# Altium PCB Tui2.PcbDoc
Units mil, origin at the board's own origin, x right, y up, seen from the top; angles counter-clockwise.
Board outline 3929.03 x 3937.01 mil, 2 copper layers (Top Layer, Bottom Layer), stack 40.6 mil thick; 72 components, 43 nets, 288 pads, 92 vias.
Unrouted connection lines stored in the file: 29.
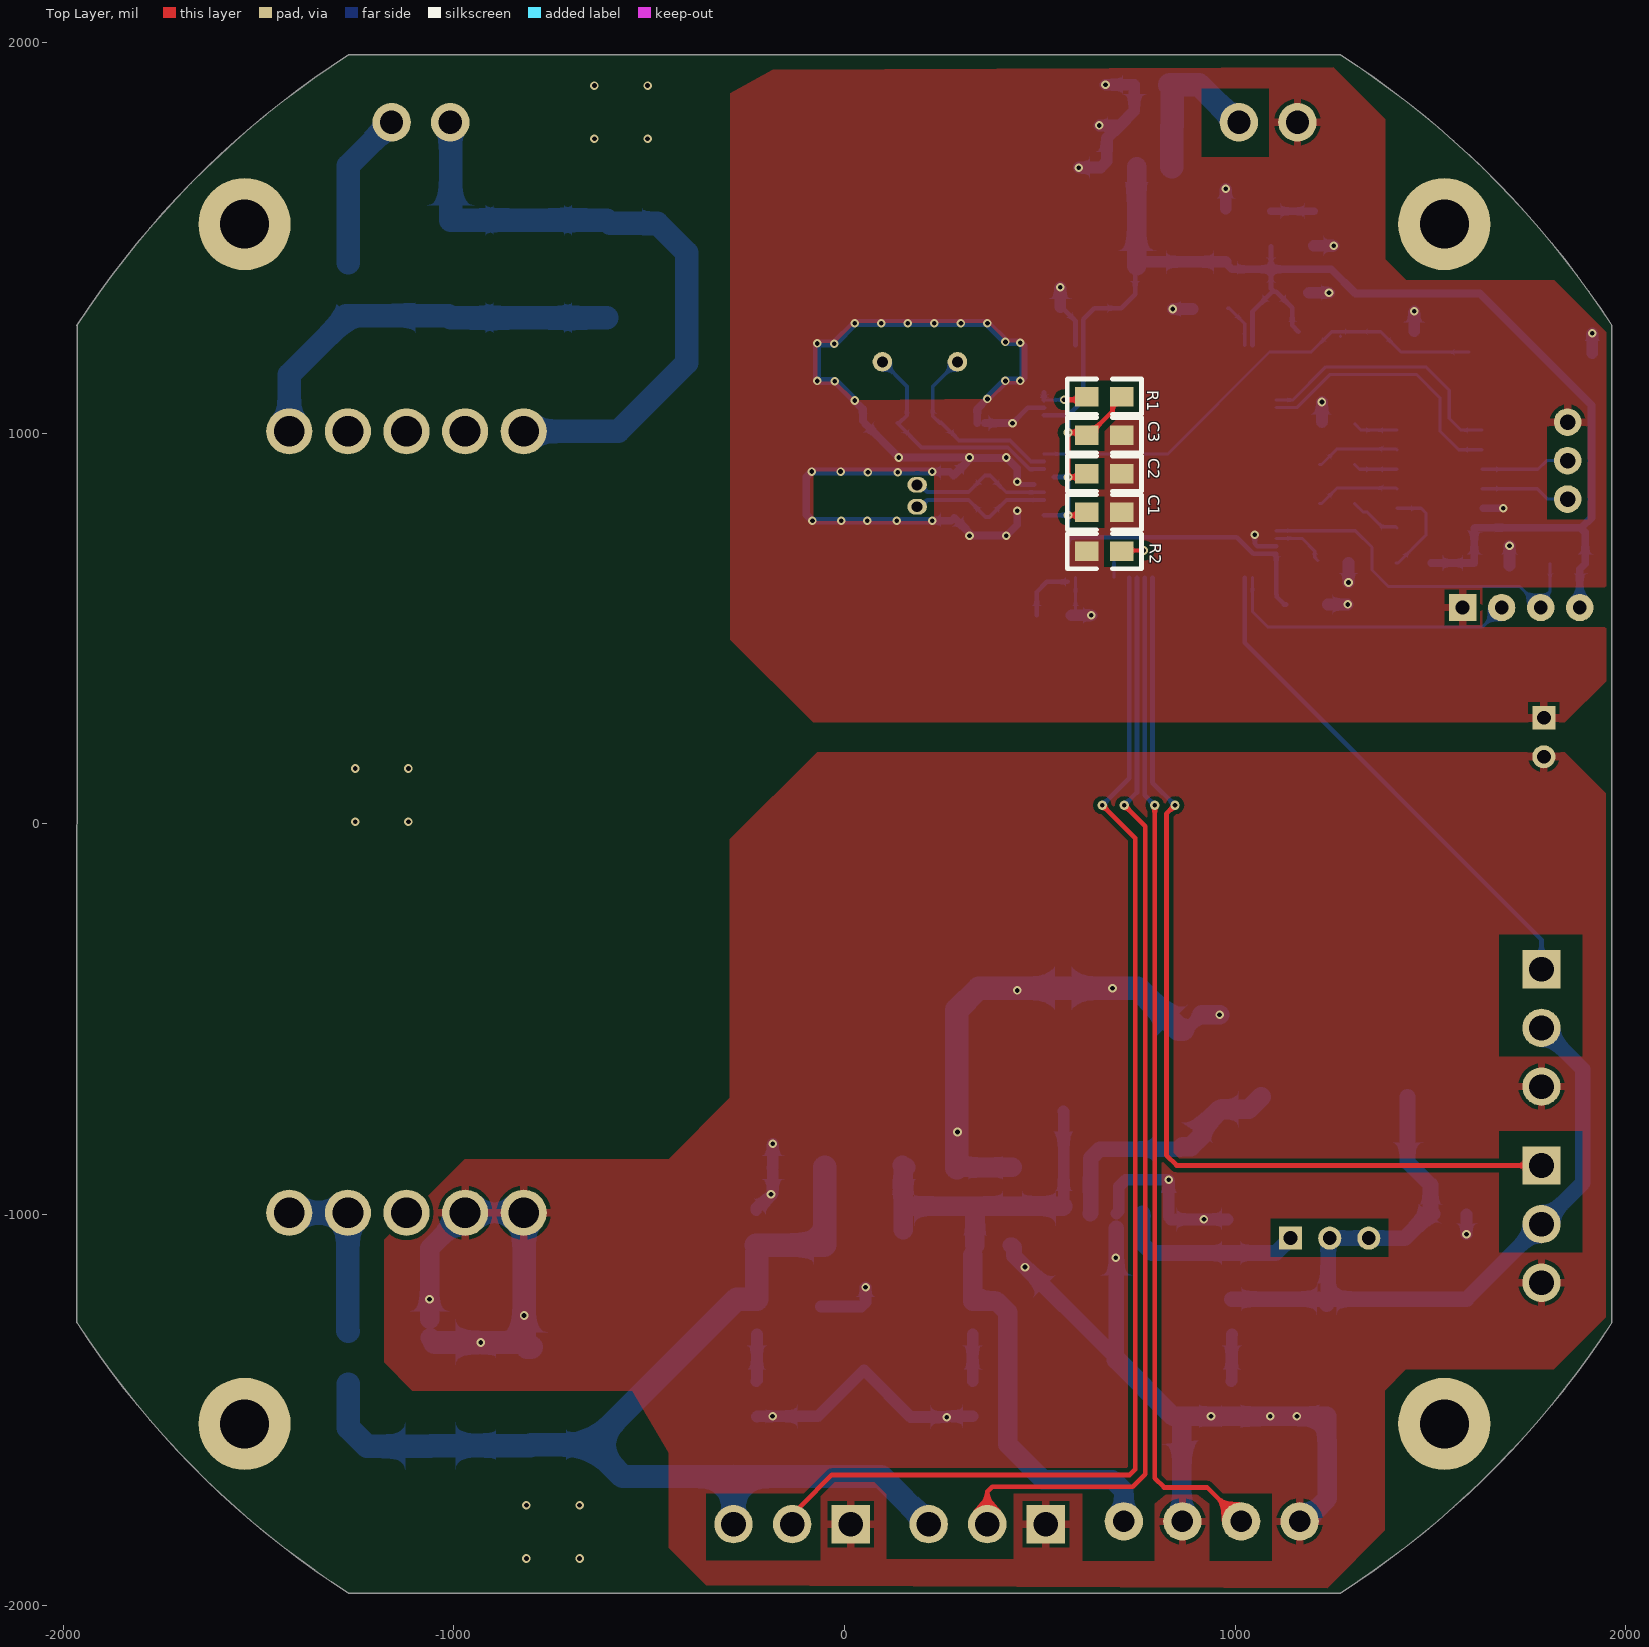
[diagram p0: Top Layer view]
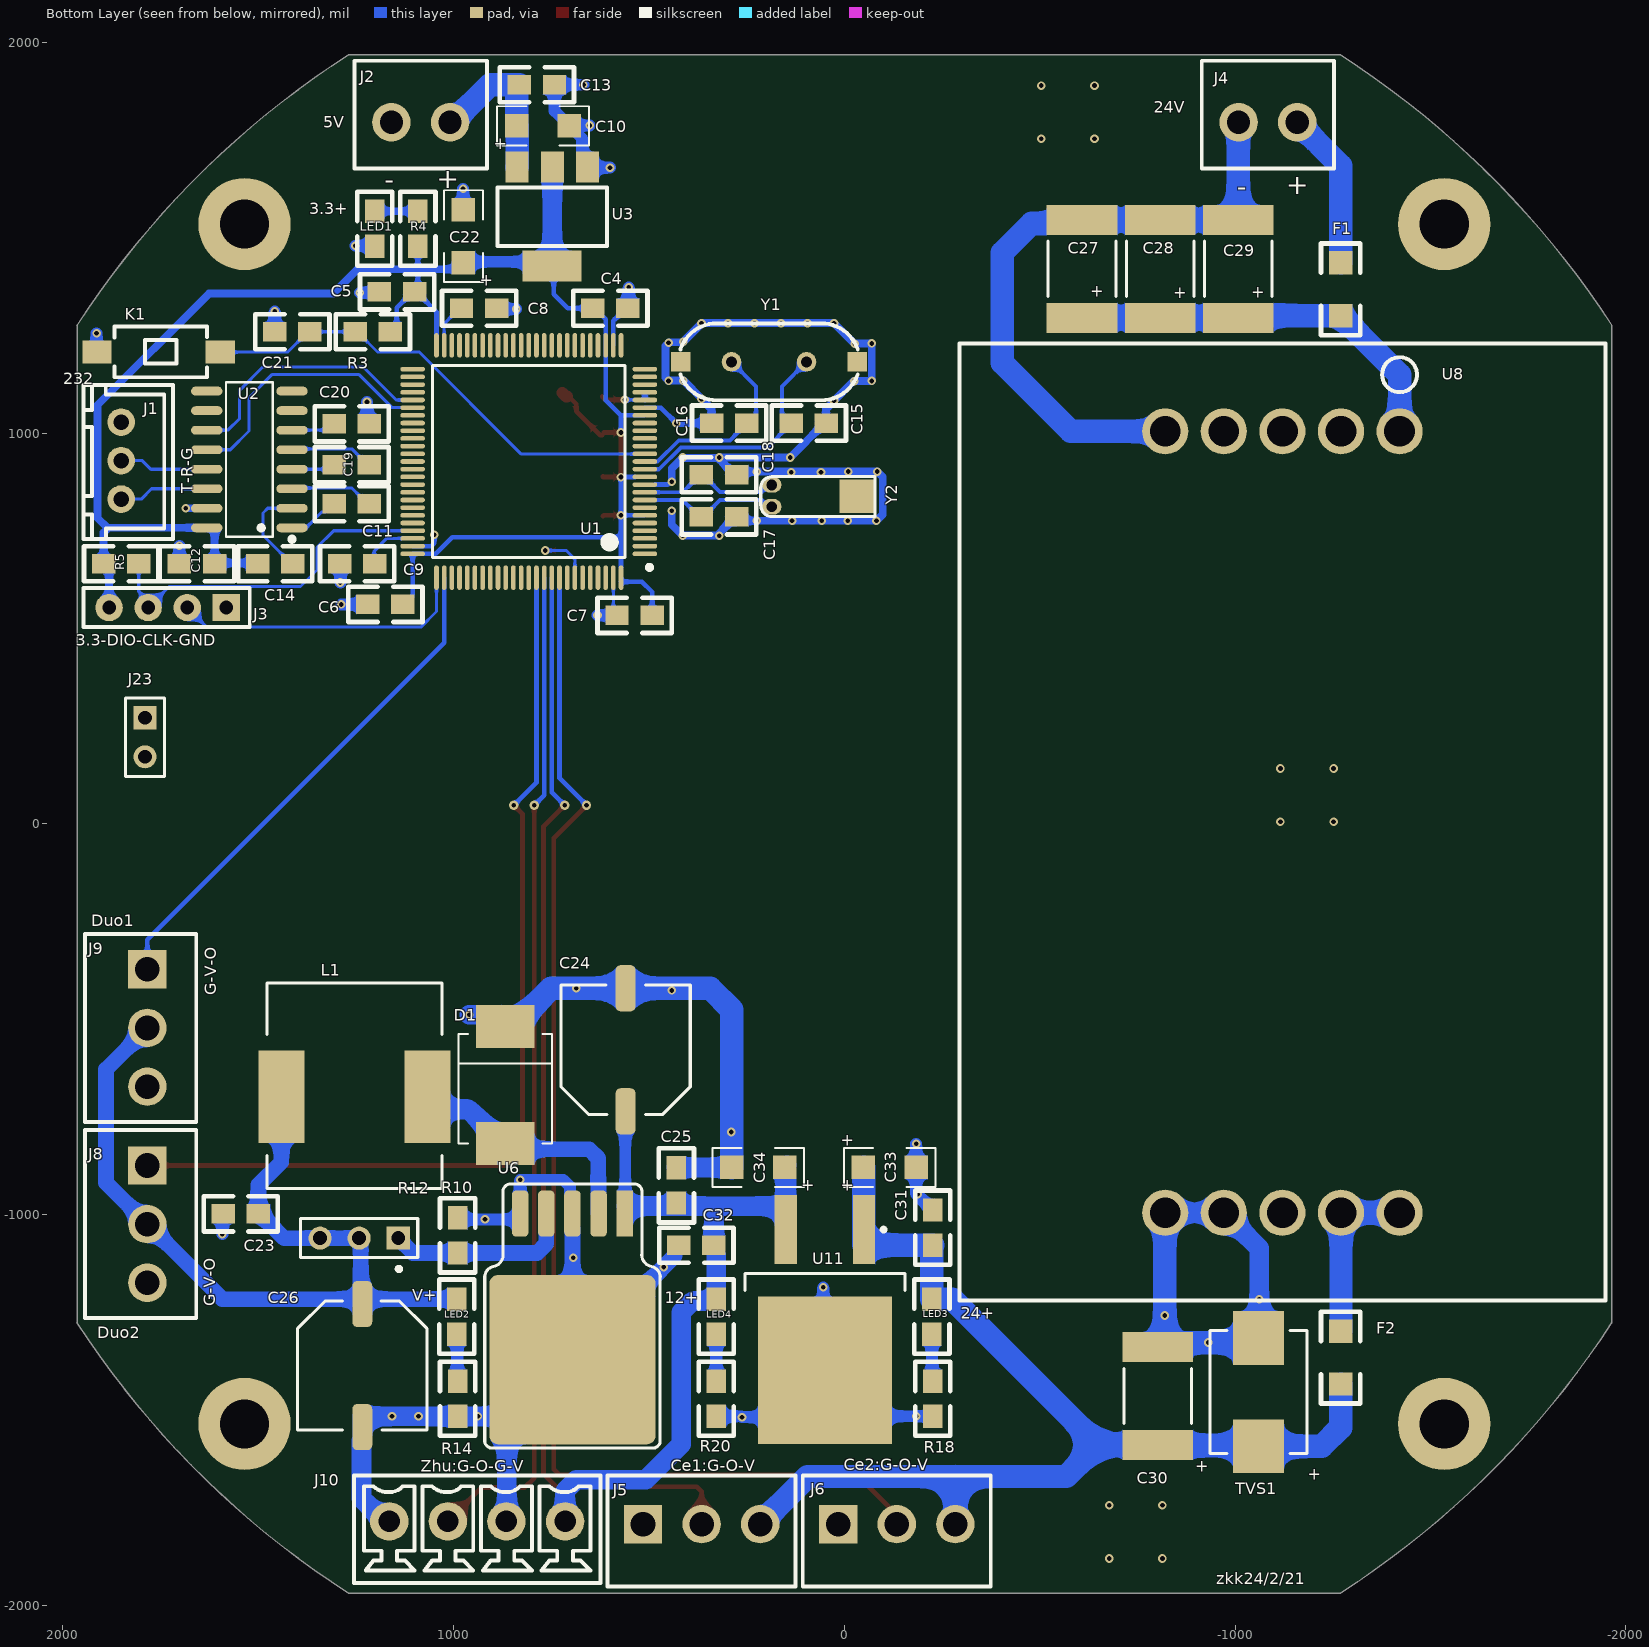
[diagram p1: Bottom Layer view, seen from below]

## Layer stack, top to bottom
Top Solder: solder mask 0.4, Solder Resist, Dk 3.5
Top Layer: signal copper 1.4
Dielectric1: core 12.6, FR-4, Dk 4.8
Dielectric2: prepreg 12.6, FR-4, Dk 4.8
Dielectric3: core 12.6, FR-4, Dk 4.8
Bottom Layer: signal copper 1.4
Bottom Solder: solder mask 0.4, Solder Resist, Dk 3.5

## Board outline
-1964.34,-1276.22 -1964,1275.83 -1964.6,1275.83 cw(c0,0) -1269.8,1968.5 1269.8,1968.5 cw(c0,0) 1964.34,1276.22 1964,1276 1964,-1275.83 1964.42,-1276.1 cw(c0,0) 1269.8,-1968.5 -1269.8,-1968.5 cw(c0,0)

## Design rules (kind name [scope] priority, off if disabled: settings)
Clearance GND1 [InNet('GND1')] p1: gap=15 ignorepadtopadclearanceinfootprint=TRUE
Clearance 3.3 [InNet('+3.3V')] p2: gap=15 ignorepadtopadclearanceinfootprint=TRUE
Clearance +5V [InNet('+5V')] p3: gap=20 ignorepadtopadclearanceinfootprint=FALSE
Clearance V5 [InNet('VCC_5V')] p4: gap=20 ignorepadtopadclearanceinfootprint=TRUE
Clearance [All] p5: gap=11 ignorepadtopadclearanceinfootprint=TRUE
FabricationTestPointUsage TestPointUsage [All] p1: valid=0 allowmultiple=FALSE
FabricationTestpoint Testpoint [All] p1: side=3 testpointundercomponent=TRUE minsize=40 maxsize=100 preferedsize=60 minholesize=0 maxholesize=40 preferedholesize=32 testpointgrid=1 allowsidetop=TRUE allowsidebottom=TRUE usegrid=TRUE gridtolerance=0.01
HoleSize [All] p1: absolutevalues=TRUE maxlimit=150 minlimit=10 maxpercent=80.000 minpercent=20.000
MinimumSolderMaskSliver [All] p1: minsoldermaskwidth=2
PlaneClearance [InNet('GND1')] p1: clearance=10
PolygonConnect PV24 [InNet('VCC_24V')] p1: thpad.connectstyle=Relief thpad.reliefconductorwidth=50 thpad.reliefentries=4 thpad.polygonreliefangle="90 Angle" thpad.airgapwidth=8 smdpad.connectstyle=Direct smdpad.reliefconductorwidth=30 smdpad.reliefentries=4 smdpad.polygonreliefangle="90 Angle" smdpad.airgapwidth=12 via.connectstyle=Direct via.reliefconductorwidth=10 via.reliefentries=4 via.polygonreliefangle="90 Angle" via.airgapwidth=10
PolygonConnect PV12 [InNet('VCC_12V')] p2: thpad.connectstyle=Relief thpad.reliefconductorwidth=10 thpad.reliefentries=4 thpad.polygonreliefangle="90 Angle" thpad.airgapwidth=10 smdpad.connectstyle=Direct smdpad.reliefconductorwidth=10 smdpad.reliefentries=4 smdpad.polygonreliefangle="90 Angle" smdpad.airgapwidth=10 via.connectstyle=Direct via.reliefconductorwidth=10 via.reliefentries=4 via.polygonreliefangle="90 Angle" via.airgapwidth=10
PolygonConnect PV5 [InNet('VCC_5V')] p3: connectstyle=Direct reliefconductorwidth=10 reliefentries=4 polygonreliefangle="90 Angle" airgapwidth=10
PolygonConnect PGND1 [InNet('GND1')] p4: thpad.connectstyle=Relief thpad.reliefconductorwidth=20 thpad.reliefentries=4 thpad.polygonreliefangle="90 Angle" thpad.airgapwidth=10 smdpad.connectstyle=Direct smdpad.reliefconductorwidth=12 smdpad.reliefentries=4 smdpad.polygonreliefangle="90 Angle" smdpad.airgapwidth=10 via.connectstyle=Direct via.reliefconductorwidth=12 via.reliefentries=4 via.polygonreliefangle="90 Angle" via.airgapwidth=10
PolygonConnect PGND2 [InNet('GND2')] p5: thpad.connectstyle=Relief thpad.reliefconductorwidth=20 thpad.reliefentries=4 thpad.polygonreliefangle="90 Angle" thpad.airgapwidth=10 smdpad.connectstyle=Relief smdpad.reliefconductorwidth=20 smdpad.reliefentries=4 smdpad.polygonreliefangle="90 Angle" smdpad.airgapwidth=10 via.connectstyle=Direct via.reliefconductorwidth=12 via.reliefentries=4 via.polygonreliefangle="90 Angle" via.airgapwidth=12
PolygonConnect [All] p6: connectstyle=Relief reliefconductorwidth=10 reliefentries=4 polygonreliefangle="90 Angle" airgapwidth=15
RoomDefinition Tui2 [InComponentClass('Tui2')] p1: confinementstyle=ConfineIn formatcopy=TRUE lockcomponents=FALSE outline -4650,-8925 -2650,-8925 -2650,-7925 -4650,-7925
RoutingVias [All] p1: holewidth=7.5 width=15 viastyle="Through Hole" minholewidth=5 minwidth=10 maxholewidth=28 maxwidth=50
SilkToSilkClearance [All] p1: silktosilkclearance=1
SilkToSolderMaskClearance SilkscreenOverComponentPads [IsPad] p1: minsilkscreentomaskgap=1 clearancetoexposedcopper=TRUE
SolderMaskExpansion [All] p1: expansion=4 istentingtop=FALSE
Width [All] p1: maxlimit=200 minlimit=8 preferedwidth=10 toplayer_prefwidth=8 minimp=50.000000 maximp=50.000000 favimp=50.000000
23 further rules are at their usual default settings.

## Components (designator, comment, footprint, x,y, rotation, side; value= is the part's Value field where it differs from the comment)
C1 "104" 0805 620,798 r0 top
C2 "104" 0805 620,896.67 r0 top
C3 "104" 0805 620,995.33 r0 top
C4 "104" 0805 644,1320 r180 bottom
C5 "104" 0805 1100,1362 r0 bottom
C6 "104" 0805 1130,562 r0 bottom
C7 "104" 0805 492,534 r0 bottom
C8 "4.7uF" 0805 890,1320 r0 bottom
C9 "4.7uF" 0805 1292,666 r180 bottom
C10 "Cap Pol1" 钽电容小 774,1782 r0 bottom value=10uF
C11 "104" 0805 1216,820 r0 bottom
C12 "104" 0805 1612,666 r0 bottom
C13 "104" 0805 742,1892 r0 bottom
C14 "104" 0805 1412,666 r0 bottom
C15 "22pF" 0805 46,1026 r0 bottom
C16 "22pF" 0805 340,1026 r180 bottom
C17 "22pF" 0805 276,786 r0 bottom
C18 "22pF" 0805 276,894 r0 bottom
C19 "104" 0805 1216,920 r0 bottom
C20 "104" 0805 1216,1024 r0 bottom
C21 "104" 0805 1368,1260 r0 bottom
C22 "Cap Pol1" 钽电容小 970,1502 r270 bottom value=10uF
C23 "105" 0805 1590,-998 r180 bottom
C24 "107T" CAP+ 560,-577.87 r90 bottom value=100uF
C25 "104" 0805 430,-880 r270 bottom
C26 "227V" CAP+ 1234,-1386 r270 bottom value=220uF
C27 "Cap Pol1" 钽电容大 -608.15,1420.62 r180 bottom value=22uF
C28 "Cap Pol1" 钽电容大 -808.15,1420.62 r180 bottom value=100uF
C29 "Cap Pol1" 钽电容大 -1008.15,1420.62 r180 bottom value=100uF
C30 "Cap Pol1" 钽电容大 -802,-1464 r180 bottom value=100uF
C31 "0.1uF" 0805 -226,-988 r270 bottom
C32 "0.1uF" 0805 424,-1078 r180 bottom
C33 "Cap Pol1" 钽电容小 -113.5,-884 r0 bottom value=2.2uF
C34 "Cap Pol1" 钽电容小 218,-874 r180 bottom value=1uF
D1 "DIODE" SS34 868,-668 r270 bottom
F1 "THERMAL FUSE" 1206 -1270,1436 r270 bottom
F2 "THERMAL FUSE" 1206 -1270,-1298.32 r270 bottom
J1 "CON3" CON3BB 1851,930 r270 bottom
J2 "CON2" CONN-TH_2P-P3.81_DB2EVC-3.81-2P-BK 1084.36,1796 r0 bottom
J3 "CON4" CON4 1732,554 r180 bottom
J4 "CON2" CONN-TH_2P-P3.81_DB2EVC-3.81-2P-BK -1084,1796 r0 bottom
J5 "CON3" CONN-TH_3P-P3.81_DB2EVC-3.81-3P 365.5,-1792 r180 bottom
J6 "CON3" CONN-TH_3P-P3.81_DB2EVC-3.81-3P -134,-1792 r180 bottom
J8 "CON3" CONN-TH_3P-P3.81_DB2EVC-3.81-3P 1784,-1024 r270 bottom
J9 "CON3" CONN-TH_3P-P3.81_DB2EVC-3.81-3P 1784,-522 r270 bottom
J10 "CON4" CONN-TH_4P-P3.81_DB2EVC-3.81-4P 940,-1785.11 r180 bottom
J23 "CON2" HDR1X2 1790,272 r270 bottom (schematic designator J?)
K1 "KEY4" 按钮 1750.24,1210 r0 bottom
L1 "470" 470 1440.94,-698 r180 bottom
LED1 "LED" 0805 1202,1568.5 r270 bottom
LED2 "" 0805 990,-1426 r270 bottom value=LED_GREEN
LED3 "LED" 0805 -224,-1216 r270 bottom
LED4 "LED" 0805 328,-1216 r270 bottom
R1 "10R" 0805 620,1094 r0 top
R2 "10K" 0805 710,698 r180 top
R3 "1.5K" 0805 1252,1260 r180 bottom
R4 "10K" 0805 1091.75,1568.5 r270 bottom
R5 "10K" 0805 1806,666 r0 bottom
R10 "330R" 0805 990,-1098 r90 bottom
R12 "10K" RESPACK 1142,-1060 r0 bottom
R14 "1k" 0805 992,-1216 r270 bottom
R18 "Res2" 0805 -226,-1426 r270 bottom value=10K
R20 "10K" 0805 328,-1426 r270 bottom
TVS1 "TVS" TVS -1060,-1454 r180 bottom
U1 "STM32F407VGT6" STM32F407VGT6 866,929.06 r90 bottom locked
U2 "MAX3232" MAX3232 1518.84,927.98 r90 bottom
U3 "AMS1117-3.3_C347222" AMS1117 742,1558 r0 bottom
U6 "LM2596S" LM2596S 696,-1184 r0 bottom
U8 "URF4824QB-200W" URF4824QB-200W（24稳压） -1126,0 r0 bottom locked
U11 "7812" 7812 50,-1268.24 r180 bottom
Y1 "XTAL8" XTAL8（晶振） 204,1178 r0 bottom locked
Y2 "XTAL32-100" XTAL32-100（晶振） 96,838 r180 bottom locked

## Footprints (in the part's own frame and the unit in brackets; to place one, negate y for a bottom-side part, rotate by r counter-clockwise, add the part's x,y. Pads: shape width x height; smd on the part's side, far side on the other; paste and mask are expansions set on the pad)
470 [mm]
  rect 3x6 smd: 1(0,0) 2(9.5,0)
  silkscreen extent -0.95,-5.97 10.45,7.39
0805 [mil]
  rect 60x50 smd: 1(0,0) 2(90,0)
  silkscreen extent -50,-45 140,45
1206 [mil]
  rect 60x60 smd: 1(0,0) 2(135,0)
  silkscreen extent -50,-50 185,50
7812 [mm]
  rect 1.45x4.5 smd: 1(2.54,5.848) 3(-2.54,5.848)
  rect 8.7x9.6 smd: 2(0,-3.302)
  silkscreen extent -5.2,1.9 5.2,5.97, body extent -5.2,-6.35 5.2,3, height 4.67
AMS1117 [mil]
  rect 59x79 smd: 1(-84.88,-123.54) 2(5.67,-123.54) 3(96.22,-123.54)
  rect 150x79 smd: 4(6.34,130)
  silkscreen extent -134,-72 146,78
CAP+ [mm]
  rrect50% 3x1.3 smd: 1(-4,0) 2(4,0)
  silkscreen extent -4.2,-4.2 4.2,4.2, body extent -4.52,-4.22 4.48,4.08, height 10.5
CON3BB [mm]
  round 1.8 hole 1 paste+0 mask+0.05: 1(-2.5,0) 2(0,0) 3(2.5,0)
  silkscreen extent -4.92,-2.44 5.09,3.38
CON4 [mil]
  rect 70x70 hole 35: 1(150,0)
  round 70 hole 35: 2(50,0) 3(-50,0) 4(-150,0)
  silkscreen extent -215,-50 210,50
CONN-TH_2P-P3.81_DB2EVC-3.81-2P-BK [mm]
  round 2.5 hole 1.5: 1(-1.905,0) 2(1.905,0)
  silkscreen extent -4.3,-4 4.3,3
CONN-TH_3P-P3.81_DB2EVC-3.81-3P [mm]
  rect 2.5x2.5 hole 1.6: 1(-3.81,0)
  round 2.5 hole 1.6: 2(0,0) 3(3.81,0)
  silkscreen extent -6.11,-4.06 6.11,3.18
CONN-TH_4P-P3.81_DB2EVC-3.81-4P [mm]
  round 2.5 hole 1.4 paste+0 mask+0.05: 1(-5.715,0) 2(-1.905,0) 3(1.905,0) 4(5.715,0)
  silkscreen extent -8.02,-4 8.02,3
HDR1X2 [mm] "Connector; Header; 2 Position"
  rect 1.5x1.5 hole 0.9: 1(0,0)
  round 1.5 hole 0.9: 2(2.54,0)
  silkscreen extent -1.27,-1.27 3.81,1.27
LM2596S [mm]
  rrect10% 10.8x11 smd: 0(0,4.75)
  rect 1.07x3 smd: 1(-3.4,-4.75)
  rrect50% 1.07x3 smd: 2(-1.7,-4.75) 3(0,-4.75) 4(1.7,-4.75) 5(3.4,-4.75)
  silkscreen extent -5.7,-6.66 5.7,10.5, body extent -5.14,-4.8 5.09,9.55, height 4.48
MAX3232 [mil]
  oval 22.6x80.24 smd mask+4: 1(-169.98,-104.88) 2(-119.98,-104.88) 3(-69.98,-104.88) 4(-19.98,-104.88) 5(30.02,-104.88) 6(80.02,-104.88) 7(130.02,-104.88) 8(180.02,-104.88) 9(180.02,113.16) 10(130.02,113.16) 11(80.02,113.16) 12(30.02,113.16) 13(-19.98,113.16) 14(-69.98,113.16) 15(-119.98,113.16) 16(-169.98,113.16)
  silkscreen extent -205,-111 203,64
RESPACK [mm]
  rect 1.5x1.5 hole 0.9: 1(0,0)
  round 1.5 hole 0.9: 2(2.54,0) 3(5.08,0)
  silkscreen extent -1.27,-1.27 6.35,2.14, body extent -2.24,-2.49 7.29,2.34, height 11.55
SS34 [mil]
  rect 110x150 smd: 1(-149.99,0.01) 2(150.01,0.01)
  silkscreen extent -130,-120 150,120, body extent -110,-77 110,77
STM32F407VGT6 [mm]
  oval 0.3x1.6 smd paste-100 mask+0.051: 1(-6.032,-9.026) 2(-5.532,-9.026) 3(-5.032,-9.026) 4(-4.532,-9.026) 5(-4.032,-9.026) 6(-3.532,-9.026) 7(-3.032,-9.026) 8(-2.532,-9.026) 9(-2.032,-9.026) 10(-1.532,-9.026) 11(-1.032,-9.026) 12(-0.532,-9.026) 13(-0.032,-9.026) 14(0.468,-9.026) 15(0.968,-9.026) 16(1.468,-9.026) 17(1.968,-9.026) 18(2.468,-9.026) 19(2.968,-9.026) 20(3.468,-9.026) 21(3.968,-9.026) 22(4.468,-9.026) 23(4.968,-9.026) 24(5.468,-9.026) 25(5.968,-9.026) 51(5.968,6.073) 52(5.468,6.073) 53(4.968,6.073) 54(4.468,6.073) 55(3.968,6.073) 56(3.468,6.073) 57(2.968,6.073) 58(2.468,6.073) 59(1.968,6.073) 60(1.468,6.073) 61(0.968,6.073) 62(0.468,6.073) 63(-0.032,6.073) 64(-0.532,6.073) 65(-1.032,6.073) 66(-1.532,6.073) 67(-2.032,6.073) 68(-2.532,6.073) 69(-3.032,6.073) 70(-3.532,6.073) 71(-4.032,6.073) 72(-4.532,6.073) 73(-5.032,6.073) 74(-5.532,6.073) 75(-6.032,6.073)
  oval 1.6x0.3 smd paste-100 mask+0.051: 26(7.518,-7.476) 27(7.518,-6.977) 28(7.518,-6.476) 29(7.518,-5.977) 30(7.518,-5.476) 31(7.518,-4.977) 32(7.518,-4.476) 33(7.518,-3.977) 34(7.518,-3.476) 35(7.518,-2.977) 36(7.518,-2.477) 37(7.518,-1.976) 38(7.518,-1.477) 39(7.518,-0.976) 40(7.518,-0.477) 41(7.518,0.024) 42(7.518,0.523) 43(7.518,1.024) 44(7.518,1.523) 45(7.518,2.024) 46(7.518,2.523) 47(7.518,3.024) 48(7.518,3.523) 49(7.518,4.024) 50(7.518,4.523) 76(-7.582,4.523) 77(-7.582,4.024) 78(-7.582,3.523) 79(-7.582,3.024) 80(-7.582,2.523) 81(-7.582,2.024) 82(-7.582,1.523) 83(-7.582,1.024) 84(-7.582,0.523) 85(-7.582,0.024) 86(-7.582,-0.477) 87(-7.582,-0.976) 88(-7.582,-1.477) 89(-7.582,-1.976) 90(-7.582,-2.476) 91(-7.582,-2.977) 92(-7.582,-3.476) 93(-7.582,-3.977) 94(-7.582,-4.476) 95(-7.582,-4.977) 96(-7.582,-5.476) 97(-7.582,-5.977) 98(-7.582,-6.476) 99(-7.582,-6.977) 100(-7.582,-7.476)
  silkscreen extent -7.06,-9.47 6.22,4.77
TVS [mm]
  rect 3.3x3.5 smd: 1(0,3.525) 2(0,-3.525)
  silkscreen extent -3.15,-4 3.15,4
URF4824QB-200W（24稳压） [mm]
  round 3 hole 2: 1(-7.493,-25.527) 2(-3.683,-25.527) 3(0.127,-25.527) 4(3.937,-25.527) 5(7.747,-25.527) 6(7.747,25.273) 7(3.937,25.273) 8(0.127,25.273) 9(-3.683,25.273) 10(-7.493,25.273)
  silkscreen extent -20.87,-31.24 21.13,30.99
XTAL8（晶振） [mil]
  round 50 hole 28: 1(-107.13,-5) 2(85,-5)
  rect 50x50 smd: ""(-237.44,-5) ""(215.31,-5)
  silkscreen extent -238,-103 216,93
XTAL32-100（晶振） [mil]
  oval 50x40 hole 28: 1(-90,-26) 2(-90,30)
  rect 92.13x86 smd: ""(130,1)
  silkscreen extent -118,-51 174,51
按钮 [mm]
  rect 1.9x1.5 smd mask+0.102: 1(-3.876,0.059) 2(4.124,0.059)
  silkscreen extent -3.01,-1.61 2.99,1.69
钽电容大 [mm]
  rect 4.6x1.95 smd: 1(0,-3.175) 2(0,3.175)
  silkscreen extent -2.2,-1.8 2.2,1.8
钽电容小 [mil]
  rect 60x60 smd: 1(65,-5) 2(-70,-5)
  silkscreen extent -120,-55 115,45

## Part data
C1 C2 C3 C4 C5 C6 C7 C8 C9 C31 C32: library part Cap, "Capacitor", LatestRevisionDate=17-Jul-2002, LatestRevisionNote="Re-released for DXP Platform.", PackageDescription="Radial Cap, Thru-Hole; 2 Leads; 0.3 in Pin Spacing", PackageReference=RAD-0.3, Published=8-Jun-2000, Publisher="Altium Limited"
C10 C22 C27 C28 C29 C30 C33 C34: "Polarized Capacitor (Radial)", LatestRevisionDate=17-Jul-2002, LatestRevisionNote="Re-released for DXP Platform.", PackageDescription="Polarized Capacitor (Radial); 2 Leads", PackageReference=RB7.6-15, Published=8-Jun-2000, Publisher="Altium Limited"
C11 C12 C13 C14 C15 C16 C17 C18 C19 C20 C21: library part CAP
C23: library part "Cap Semi", "Capacitor (Semiconductor SIM Model)", PackageDescription="Chip Capacitor", PackageReference=C0603, 贴?=SMT
C24 C26: library part "Cap Pol1", "Polarized Capacitor (Radial)", LatestRevisionDate=17-Jul-2002, LatestRevisionNote="Re-released for DXP Platform.", PackageDescription="Polarized Capacitor (Radial); 2 Leads", PackageReference=RB7.6-15, Published=8-Jun-2000, Publisher="Altium Limited"
C25: library part "Cap Semi_1", "Capacitor (Semiconductor SIM Model)", PackageDescription="Chip Capacitor", PackageReference=C0603, 贴?=SMT
D1: library part DI
J8 J9: library part "Header 3", "Header, 3-Pin", LatestRevisionDate=17-Jul-2002, LatestRevisionNote="Re-released for DXP Platform.", Publisher="Altium Limited"
LED1 LED3 LED4: PackageDocument=Feb-2002, LatestRevisionDate=17-Jul-2002, LatestRevisionNote="Re-released for DXP Platform.", PackageReference=3.2X1.6X1.1, Published=8-Jun-2000, Publisher="Altium Limited"
LED2: library part LED2, "Typical RED, GREEN, YELLOW, AMBER GaAs LED", PackageDescription="SM LED; 2 Flat Leads", PackageReference=0603, 贴?=SMT
R1 R2 R4 R20: library part Res2, "Resistor", LatestRevisionDate=17-Jul-2002, LatestRevisionNote="Re-released for DXP Platform.", PackageDescription="Axial Device, Thru-Hole; 2 Leads; 0.4 in Pin Spacing", PackageReference=AXIAL-0.4, Published=8-Jun-2000, Publisher="Altium Limited"
R3 R5 R14: library part RES
  R14: PackageDescription=R0603, PackageReference=R0603, 贴?=SMT
R10: library part Res3, "Resistor", PackageDescription="Chip Resistor", PackageReference=R0603, 贴?=SMT
R12: library part RESP
R18: "Resistor", LatestRevisionDate=17-Jul-2002, LatestRevisionNote="Re-released for DXP Platform.", PackageDescription="Axial Device, Thru-Hole; 2 Leads; 0.4 in Pin Spacing", PackageReference=AXIAL-0.4, Published=8-Jun-2000, Publisher="Altium Limited"
TVS1: library part 稳压二极管, "Zener Diode"
U1: "ARM Cortex-M4 32b MCU+FPU, 210DMIP, 1024 kB Flash, 192+4 kB RAM, Camera, 82 I/Os, 100-pin LQFP, -40 to +85癈, Tray", Operating Frequency (Processor Speed)=168MHz, 16-bit Timers (IC/OC/PWM)=12x16-bit(24/24/30), 32-bit Timer (IC/OC/PWM)="2x32-bit (8/8/8)", A/D Converter=16x12-bit, ComponentLink1Description="Manufacturer URL", ComponentLink1URL=http://www.st.com/, ComponentLink2Description="STM32F405/7 Datasheet", ComponentLink2URL=http://www.st.com/internet/com/TECHNICAL_RESOURCES/TECHNICAL_LITERATURE/DATASHEET/DM00037051.pdf, ComponentLink3Description="STM32F4 Web Page", ComponentLink3URL=http://www.st.com/internet/mcu/subclass/1521.jsp, D/A Converter=2x12-bit, DatasheetVersion="rev2, Jan-2012", Internal RAM=192kB, Other Timer Functions="2xWDG, RTC, 24-bit down counter", PackageDescription="100-Pin Low Profile Quad Flat Package, 14x14 mm Body, 0.5 mm Pitch", PackageReference=LQFP100, PackageVersion=2012, Serial Interface="3xSPI/2xI2S/2xI2C/3xUSART(IrDa, ISO7816)/3xUART/2xUSB OTG FS/HS, 2xCAN/Ethernet MAC10/100, SDIO"
U3: Dropout Voltage=1.3V@(1A), JLCPCB Part Class="Extended Part", LCSC Part Name=AMS1117-3.3, Manufacturer=UMW(广东友台半导体), Maximum Input Voltage=18V, Output Current=1A, Output Voltage=3.3V, Power Supply Rejection Ratio (PSRR)=60dB@(120Hz), Add into BOM=yes, Convert to PCB=yes, Datasheet=https://atta.szlcsc.com/upload/public/pdf/source/20211011/50CC665C22E3A66C08379A4A74BDA25C.pdf, Device=AMS1117-3.3_C347222, Manufacturer Part=AMS1117-3.3, Name=AMS1117-3.3, Number of Outputs=1, Output Polarity=正, Output Type=固定, Supplier=LCSC, Supplier Footprint=SOT-223, Supplier Part=C347222, Symbol=AMS1117-3.3_C347222
U6: library part LM25
U11: library part L7912CV
Y1 Y2: LatestRevisionDate=17-Jul-2002, LatestRevisionNote="Re-released for DXP Platform.", Published=8-Jun-2000, Publisher="Altium Limited"

## Free pads (board coordinates)
  round 236.22 hole 125.98: 0(1535.43,1535.43) 1(-1535.43,1535.43) 2(1535.43,-1535.43) 3(-1535.43,-1535.43)

## Via types
v1: diameter 22, hole 12, Top Layer to Bottom Layer, 88 vias
v2: diameter 24, hole 12, Top Layer to Bottom Layer, 4 vias

## Nets (pads, with @x,y where several pads share a name; then routed paths per layer and width w, separated by ;. In a path a pad name is that pad's centre, name@x,y a point inside that pad or via, vN(x,y) a via of type N, cw(c..) or ccw(c..) an arc to the next point about the centre after c; other vN are vias at no path point)
+3.3V: C1.1 C2.1 C3.1 C4.1 C5.1 C6.1 C7.1 C12.1 C14.2 C22.1 J3.4 R1.2 R3.2 R4.2 R5.2 U1.6 U1.11 U1.19 U1.28 U1.50 U1.75 U1.100 U2.16 U3.2 U3.4 | length 5181.7
  Top Layer w12: v1(572,790) 616,790 C1.1@618,788 ; C3.1@616,1002 v1(572,1002) v1(572,888) 616.66,888 C2.1@618,889.34 ; C3.1 625,995.33 686,1056.33 686,1075 705,1094 R1.2
  Top Layer w30: R1.2 712,1094 R1.2@722,1104
  Bottom Layer w12: C7.1 492,593.83 518.17,620 U1.100@571.56,620 ; U1.6 v1(572,790) ; U1.19 572.92,1045.9 ; U1.11@536.13,888.33 571.67,888.33 v1(572,888) v1(572,790) ; U1.100@571.74,656.05 571.74,734 ; v1(572,1002) 572,1044.98 572.92,1045.9 ; U3.4 744,1423.66 744,1356 708,1320 C4.1 639,1320 611.02,1292.02 U1.28 611.02,1084 572.92,1045.9 ; U1.50 1044.09,1311.09 1095,1362 C5.1 ; R4.2 1091.75,1420 1091.75,1370.25 C5.1 ; C6.1 1125,562 1106,581 1106,587.14 1105.11,588.03 U1.75 1046.43,691.57 1004,734 571.74,734 ; R3.2 1146.03,1275.97 1146.03,1320.97 1105,1362 C5.1 ; 571.74,734 571.74,789.74 v1(572,790)
  Bottom Layer w20: C22.1 992,1420 1091.75,1420 1246,1420 1308,1358 1626,1358 1912,1072 1912,784 1886,758 1613.2,758 1612,756.8 1612,668 C14.2@1502,668 ; J3.4 1882,652 R5.2 1896,746 1885,757
  Bottom Layer w30: U3.4 759.09,1438.75 C22.1@975,1438.75
  Bottom Layer w50: U3.4@747.67,1428.67 U3.2
+5V: C10.1 C13.2 J2.1 U3.3 | length 429.3
  Bottom Layer w60: C10.1@837.72,1787 837.72,1682.04 U3.3 ; C10.1 839,1885 C13.2 907.12,1892 1003.12,1796 J2.1@1008,1796
GND1: C1.2 C2.2 C3.2 C4.2 C5.2 C6.2 C7.2 C8.1 C9.1 C10.2 C12.2 C13.1 C15.1 C16.1 C17.1 C18.1 C20.1 C21.2 C22.2 J1.1 J2.2 J3.1 J23.1 K1.2 LED1.2 R2.2 U1.10 U1.20 U1.27 U1.74 U1.99 U2.15 U3.1 | length 4359.1
  Bottom Layer w8: C7.2@582,532 591.33,541.33 U1.99
  Bottom Layer w12: v1(-70,1134) v1@-69.91,1134.09 ; v1(-8.62,776) v1(-8.62,776) v1@-8.58,777.96 ; v1@-4,778 v1@-2,776 ; v1@26.64,1082.36 v1(26.64,1084) ; C15.1@47.03,1031.97 53,1026 C15.1@53,1024 ; v1@54.38,776 59,780.62 59,779.62 v1@62.62,776 ; v1(134,776) v1@139.83,776 ; C18.1@269.29,901.71 C18.1@279,892 ; C17.1@273,776 C17.1@281,784 ; v1@318.09,931.09 318.09,934.09 v1@321,937 ; v1@364,1088 v1@364.92,1088 ; v1@365.84,1280.98 v1(365.84,1282) ; v1@405.29,738 411.29,744 v1@414,744 ; v1@412,1135.08 412,1136 v1@413,1135 ; v1@412,1234.82 v1(412,1233.8) v1@413,1232.8 ; v1@413,937 v1(414,938) ; v1(430,1026) 469.59,1065.59 U1.20 ; v1(442,876) 444.71,876 451.97,868.73 U1.10@485.13,868.73 ; v1@449,1232.8 v1(450,1231.8) ; C4.2 559,1320 591.33,1287.67 U1.27 ; v1(1050,740) 1050,718.28 1057.03,711.25 U1.74
  Bottom Layer w20: v1(-84,902) -98,888 -98,792 v1(-82,776) ; v1@-83,902.29 v1@-10,902.29 ; v1@-77.38,776 v1(-8.62,776) ; v1(-70,1134) v1(-70,1230) ; v1@-69.91,1134.09 -24.09,1134.09 v1@26,1084 ; v1@-66,1230 -25.36,1230 v1(26.64,1282) v1(94.48,1282) v1(162.32,1282) v1(230.16,1282) v1(298,1282) v1(365.84,1282) ; v1(-10,902) v1(224.48,902.04) ; v1@-2,776 v1@54.38,776 ; v1@26.64,1082.36 47.03,1061.97 C15.1@47.03,1031.97 ; C15.1@53,1024 v1(139,938) v1(320,938) ; v1@62.62,776 v1(134,776) ; v1@140,776 v1(224.48,776) C17.1@273,776 ; v1@224.82,901.71 C18.1@269.29,901.71 ; C18.1@279,892 v1@318.09,931.09 ; C17.1@281,784 327,738 v1@405.29,738 ; v1@321,937 v1@413,937 ; C16.1 340,1062.16 v1(365.84,1088) ; C16.1@359,1026 v1(430,1026) ; v1@364.92,1088 v1@412,1135.08 ; v1@365.84,1280.98 v1@412,1234.82 ; v1@413,1135 v1@449,1135 ; v1@413,1232.8 v1@449,1232.8 ; v1(414,738) 442,766 v1(442,802) ; v1(414,938) 442,910 v1(442,876) ; v1(450,1134) 450,1134.54 458,1142.54 458,1223.26 450,1231.26 v1(450,1231.8) ; U2.15@1635,808 v1(1686,808)
  Bottom Layer w30: C4.2@552,1323 v1(552,1374) ; C7.2@581,534 v1(632,534) ; v1(600,1680) 655.57,1680 U3.1 671.62,1696.04 671.62,1754.62 C10.2 ; v1(652,1788) 703,1788 C10.2 ; v1(668,1892) C13.1 742,1825 C10.2 ; v1(840,1318) C8.1@891,1318 ; C22.2@976,1575 v1(976,1626) ; C5.2@1189,1360 v1(1240,1360) ; LED1.2@1201,1480 v1(1252,1480) ; C20.1@1222,1029 v1(1222,1080) ; C6.2@1237,562 v1(1288,562) ; v1(1290,618) C9.1@1290,669 ; C21.2@1458,1261 v1(1458,1312) ; C12.2@1702,661 v1(1702,712) ; K1.2@1914,1205 v1(1914,1256)
  other v1: 320,738 58,776 60,900 136,900 -25.14,1133.56 412,1134 -26.41,1229.48
GND2: C23.1 C24.2 C25.1 C26.2 C30.2 C31.1 C32.1 C33.2 C34.2 D1.1 J5.1 J6.1 J8.3 J9.3 J10.1 J10.3 J23.2 LED2.2 R10.2 R18.2 R20.2 TVS1.1 U6.0 U6.3 U6.5 U8.6 U8.7 U11.2 | length 5798.7
  Bottom Layer w30: C31.1 -226,-983 -216,-973 -211,-973 -183.5,-945.5 C33.2@-183.5,-890.25 ; R18.2@-224,-1517 -223,-1516 v1(-184,-1516) -67.76,-1516 U11.2 169.76,-1518 v1(262,-1518) 264,-1516 R20.2 ; C33.2@-184.5,-880 C33.2 ; C33.2@-183.5,-872.5 v1(-183.5,-818.25) ; U11.2@-60,-1235 43.26,-1235 54,-1224.26 v1(54,-1186) ; U6.3 702.06,-990.93 702.06,-927.89 719.64,-910.31 v1(829.69,-910.31) 829.69,-996.82 U6.5 829.86,-1005.94 835.92,-1012 R10.2@981,-1012 ; D1.1 883.99,-518.01 D1.1@914,-488 ; v1(1592,-1050) C23.1@1592,-999
  Bottom Layer w40: C32.1 429,-1078 434,-1083 434,-1105.07 U6.0@696,-1367.07 ; U6.0 U6.0@696,-1367.07 ; U6.3@696,-1035 U6.0@696,-1367.07
  Bottom Layer w50: TVS1.1@-1062,-1267 -1062,-1086 U8.7 U8.6 ; TVS1.1 TVS1.1@-1048.11,-1327.11 ; C30.2@-813.89,-1327.11 C30.2 ; C34.2 C25.1@429.86,-879 ; U6.0 840.99,-1516 U6.0@870,-1516 ; J10.3@865,-1798 863.67,-1796.67 863.67,-1522.33 U6.0@870,-1516 ; D1.1@914,-488 v1(960,-488) ; J10.1 1176.89,-1785.11 1236,-1726 1236,-1578.94 1234,-1576.94 1234,-1516 v1(1158,-1516) v1(1090,-1516) LED2.2 v1(938,-1516) U6.0@870,-1516
  Bottom Layer w60: TVS1.1@-1048.11,-1327.11 v1(-931,-1327.11) C30.2@-813.89,-1327.11 ; U8.6@-820,-996 -820,-1330.61 -811.61,-1339 C30.2 ; C34.2@288,-880 287.86,-879.86 287.86,-879 287.86,-475.86 343.32,-420.39 442,-420.39 685.61,-420.39 v1(686,-420) 749.98,-420 855.99,-526.01 D1.1@865.99,-526.01
  other v1: -820,-1258 -1062,-1216 462,-1134 694,-1110 920,-1012 -188,-948 289.31,-788.25 442,-426
IN1: J9.1 U1.77 | length 1317.2
  Bottom Layer w12: U1.77 1024.41,463.59 1784,-296 J9.1
IN2: J8.1 U1.89 | length 2482.4
  Top Layer w12: v2(846,48) 824,26 824,-848 850,-874 J8.1
  Bottom Layer w12: U1.89 788.19,105.81 v2(846,48)
IN3: J10.2 U1.90 | length 2582.1
  Top Layer w12: v2(794,48) 794,-1577 794,-1674 818,-1698 927.89,-1698 J10.2
  Bottom Layer w12: U1.90 768.5,73.5 v2(794,48)
IN4: J5.2 U1.91 | length 2836.9
  Top Layer w12: J5.2 365.5,-1708.5 378,-1696 738,-1696 770,-1664 770,-6 v2(716,48)
  Bottom Layer w12: v2(716,48) 748.72,80.72 748.72,605.06 748.81,605.15 U1.91
IN5: J6.2 U1.92 | length 3296
  Top Layer w12: J6.2 -134,-1768.61 -110.47,-1745.09 -110.47,-1744.47 -32,-1666 730,-1666 744,-1652 744,-36 v2(660,48)
  Bottom Layer w12: v2(660,48) 729.13,117.13 U1.92
NetC8_2: C8.2 U1.49 | length 116.3
  Bottom Layer w8: C8.2 985,1320 1024.41,1280.59 U1.49
NetC9_2: C9.2 U1.73 | length 139.8
  Bottom Layer w8: U1.73 1171.06,730.94 1203.69,698.31 1203.69,682.31 C9.2@1212,674
NetC11_1: C11.1 U2.3 | length 215.4
  Bottom Layer w8: C11.1 1221,820 1261,860 1411.96,860 U2.3
NetC11_2: C11.2 U2.1 | length 133.6
  Bottom Layer w8: C11.2 1327,799 1337,799 1375.21,760.79 1411.17,760.79 U2.1
NetC14_1: C14.1 U2.2 | length 241.4
  Bottom Layer w8: C14.1@1412,668 1417,668 1488,739 1488,796 1476,808 U2.2
NetC19_1: C19.1 U2.5 | length 215.4
  Bottom Layer w8: C19.1 1221,920 1261,960 1411.96,960 U2.5
NetC19_2: C19.2 U2.4 | length 112.9
  Bottom Layer w8: C19.2 1318,908 U2.4
NetC20_2: C20.2 U2.6 | length 114.6
  Bottom Layer w8: C20.2 1322,1008 U2.6
NetC27_1: C27.1 C28.1 C29.1 F1.2 U8.1 | length 1027.6
  Bottom Layer w60: U8.1 -1421,1150 F1.2 ; F1.2@-1275,1301 -1013.53,1301 C29.1 C28.1 C27.1
NetC27_2: C27.2 C28.2 C29.2 J4.2 U8.5 | length 1664.8
  Bottom Layer w60: J4.2@-1008.15,1796.35 C29.2 -935,1545.62 C28.2 C27.2 -599.76,1537.24 -479.24,1537.24 -404,1462 -404,1180.34 -579.34,1005 U8.5 U8.5@-825,1005
NetD1_2: D1.2 L1.2 U6.2 | length 655.7
  Bottom Layer w40: U6.2 630.13,-995.93 630.13,-855.43 653.57,-832 860,-832 D1.2@865.99,-826.01
  Bottom Layer w50: D1.2@865.99,-826.01 885.99,-826.01 915.99,-796.01 915.99,-776.01 962.17,-729.83 1035.1,-729.83 L1.2
NetF1_1: F1.1 J4.1 | length 406
  Bottom Layer w60: F1.1 -1270,1685 J4.1
NetF2_1: F2.1 U8.9 U8.10 | length 453.7
  Bottom Layer w60: U8.10 U8.9 -1271,-1297.32 F2.1
NetLED1_1: LED1.1 R4.1 | length 110.2
  Bottom Layer w20: R4.1 LED1.1
NetLED2_1: LED2.1 R14.2 | length 120.8
  Bottom Layer w30: LED2.1 991,-1425 991,-1307 R14.2
NetLED3_2: LED3.2 R18.1 | length 120.8
  Bottom Layer w30: R18.1 -224,-1424 LED3.2
NetLED4_2: LED4.2 R20.1 | length 120
  Bottom Layer w30: R20.1 LED4.2
NetR2_1: R2.1 U1.94 | length 189.5
  Top Layer w8: R2.1 712,700 v1(766,700)
  Bottom Layer w8: U1.94 689.76,677.76 712,700 v1(766,700)
NetR10_1: R10.1 R12.1 U6.4 | length 499.2
  Bottom Layer w30: U6.4 U6.4@768.99,-1003.06 ; R10.1@986,-1098 R10.1@992,-1092
  Bottom Layer w40: U6.4 762.93,-1074.57 786.36,-1098 986,-1098 R10.1 1104,-1098 R12.1
OSC32IN: C17.2 U1.8 Y2.1 | length 367.4
  Bottom Layer w10: Y2.1 194.86,812 211.86,829 318,829 361,786 371,786 414.36,829.36 U1.8
OSC32OUT: C18.2 U1.9 Y2.2 | length 369
  Bottom Layer w10: Y2.2 193.86,868 211.86,850 318,850 341,873 341,874 359,892 373,892 391,874 391,872 413.95,849.05 U1.9
OSCIN: C15.2 U1.12 Y1.1 | length 620.9
  Bottom Layer w10: Y1.1 160,1119.87 160,1046 140,1026 135,1026 197,964 418,964 473.89,908.11 U1.12
OSCOUT: C16.2 U1.13 Y1.2 | length 495.7
  Bottom Layer w10: C16.2@244,1026 226,1044 226,1120 Y1.2 ; C16.2@247,1028 293,982 424,982 477.86,928.14 510.28,928.14 U1.13
OUT+: C23.2 C26.1 J8.2 J9.2 L1.1 R12.2 R12.3 R14.1 | length 2216.8
  Bottom Layer w30: R12.2@1238,-1064 R12.2
  Bottom Layer w40: R14.1 1223.41,-1216 1227.41,-1220 C26.1@1238,-1220 ; C26.1 C26.1@1246.52,-1216 ; C26.1@1238,-1200.54 R12.2@1238,-1064 ; C26.1@1239.59,-1216 1592,-1216 J8.2 1890,-918 1890,-628 J9.2 ; R12.2@1250,-1060 1434,-1060 C23.2@1490,-1004 ; R12.3@1350,-1060 R12.3@1350,-1057.16 ; L1.1 1440.94,-864.94 1500,-924 C23.2 C23.2@1505,-998
RST: C21.1 K1.1 R3.1 U1.14 | length 1239.8
  Bottom Layer w8: U1.14 511.28,946.75 826.75,946.75 1088,1208 1195,1208 1247,1260 R3.1 C21.1 1373,1260 1425.32,1207.68 K1.1 ; R3.1@1270,1248 R3.1@1270,1249
RXA: J1.2 U2.13 | length 191.1
  Bottom Layer w8: U2.13 1774.99,908 1796.99,930 1814,930
RXD: U1.56 U2.12 | length 691.4
  Bottom Layer w8: U1.56 1140.58,1065.59 1157.59,1065.59 1242,1150 1465.31,1150 1524,1091.31 1524,1006 1572,958 U2.12
SWCLK: J3.2 U1.76 | length 761.8
  Bottom Layer w8: U1.76 1044.09,543.91 1084,504 1632,504 J3.2
SWDIO: J3.3 R5.1 U1.72 | length 914.3
  Bottom Layer w8: U1.72 1307.38,750.62 1350,708 1350,650 1392,608 1728,608 J3.3 1782,570.78 1806,594.78 R5.1
TXA: J1.3 U2.14 | length 192.9
  Bottom Layer w8: U2.14 1773.35,858 1799.78,831.57 1814,831.57
TXD: U1.55 U2.11 | length 671.3
  Bottom Layer w8: U1.55 1147.27,1085.27 1232,1170 1488,1170 1548,1110 1548,1038 1578,1008 U2.11
VCC_12V: C24.1 C25.2 C32.2 C34.1 J10.4 LED4.1 U6.1 U11.3 | length 1891
  Bottom Layer w30: U6.1@558.2,-978 561.07,-975.13 561.07,-736.43 C24.1
  Bottom Layer w50: C34.1@148,-874 C34.1 ; U11.3 150,-886 C34.1@157,-879 ; U11.3@163.54,-978 330,-978 ; 328,-1103.64 LED4.1 328,-1221 388.71,-1221 418,-1250.29 418,-1588 508,-1678 685.71,-1678 715,-1707.29 J10.4 ; C32.2 334,-982 330,-978 ; U6.1@558.2,-978 330,-978
VCC_24V: C30.1 C31.2 C33.1 F2.2 J5.3 J6.3 LED3.1 TVS1.2 U11.1 | length 2910.7
  Bottom Layer w60: F2.2 -1270,-1544.85 -1222.07,-1592.78 TVS1.2 -1058.11,-1590.89 -803.89,-1590.89 C30.1 -637,-1589 ; J6.3 -284,-1670 ; C31.2 -51.46,-1078 -50,-1076.54 U11.1 C33.1@-50,-879 ; C31.2@-224,-1096 LED3.1 -276,-1216 -649,-1589 -568,-1670 -284,-1670 ; J5.3@216,-1792 94,-1670 -284,-1670
VDD: R1.1 U1.21 U1.22 | length 132.8
  Top Layer w12: v1(562,1086) 612,1086 R1.1
  Bottom Layer w8: U1.21 510.92,1085.64 561.64,1085.64 v1(562,1086)
  Bottom Layer w12: U1.21 U1.22
pads on no net: U1.1 U1.2 U1.3 U1.4 U1.5 U1.7 U1.15 U1.16 U1.17 U1.18 U1.23 U1.24 U1.25 U1.26 U1.29 U1.30 U1.31 U1.32 U1.33 U1.34 U1.35 U1.36 U1.37 U1.38 U1.39 U1.40 U1.41 U1.42 U1.43 U1.44 U1.45 U1.46 U1.47 U1.48 U1.51 U1.52 U1.53 U1.54 U1.57 U1.58 U1.59 U1.60 U1.61 U1.62 U1.63 U1.64 U1.65 U1.66 U1.67 U1.68 U1.69 U1.70 U1.71 U1.78 U1.79 U1.80 U1.81 U1.82 U1.83 U1.84 U1.85 U1.86 U1.87 U1.88 U1.93 U1.95 U1.96 U1.97 U1.98 U2.7 U2.8 U2.9 U2.10 U8.2 U8.3 U8.4 U8.8 Y1. Y2.
copper on no net:
  other v1: -814,-1880 -678,-1880 -814,-1744 -678,-1744 -1252,6 -1116,6 -1252,142 -1116,142 -640,1754 -504,1754 -640,1890 -504,1890

## Polygon pours and split planes (outlines as drawn)
GND2 on Top Layer "Top Layer-GND2" (solid, remove dead copper, pour order 198): -450,-1852 -353.45,-1948.55 1235.53,-1955.47 1383,-1808 1383,-1450 1437,-1396 1815,-1396 1949,-1262 1949,79 1844,184 1736,184 -70,184 -293,-39 -293,-701 -450,-858 -972,-858 -1178,-1064 -1178,-1378 -1106,-1450 -542.6,-1450 -450,-1608.82
GND1 on Top Layer "Top Layer-GND1" (solid, remove dead copper, pour order 197): -292,472 -80,260 1736,260 1844,260 1950,366 1950,1258 1816,1392 1438,1392 1384,1446 1384,1804 1251.13,1936.87 -183.18,1931.04 -292,1870

## Other copper
Top Layer:
  pour cut-out: 990.45,-1714 901.55,-1714 948.45,-1750 982.45,-1722
  pour cut-out: 214,-1678 70.91,-1678 135.45,-1742.55 188,-1704
  pour cut-out: 848,-1690 717.64,-1690 788,-1744 822,-1716
  pour cut-out: 1093,-1714 935,-1714 935,-1886 1093,-1886
  pour cut-out: 1392,-1107.48 1392,-1010 1091,-1010 1091,-1107.48
  pour cut-out: -62,-1714 -354,-1714 -354,-1884 -62,-1884
  pour cut-out: 432,-1676 108,-1676 108,-1880 432,-1880
  pour cut-out: 793,-1680 610,-1680 610,-1886 793,-1886
  pour cut-out: 1888,-786 1676,-786 1676,-1096 1888,-1096
  pour cut-out: 1888,-284 1676,-284 1676,-594 1888,-594
  pour cut-out: 1946,504 1946,606 1632,606 1632,504
  pour cut-out: 1799,780 1901,780 1901,1016.86 1799,1016.86
  pour cut-out: 914,1708 1086,1708 1086,1882 914,1882
  pour cut-out: 452.02,1231.8 452.02,1134 416.02,1134 414.02,1136 367.86,1089.84 367.86,1088 28.66,1084 -20.9,1133.56 -67.54,1133.56 -67.98,1134 -67.98,1230 -24.91,1230 -24.39,1229.48 28.14,1282 367.86,1282 367.86,1279.96 416.02,1231.8
  pour cut-out: 228.22,902 228.22,775.96 -78.26,775.96 -78.26,899.96 -80.26,901.96 -80.22,902
Bottom Layer:
  pour cut-out: -995.55,-1517.84 -994.91,-1517.62 -995.55,-1517.74

## Silkscreen, mask and mechanical layers (free items; w line width, h text height)
Top Overlay:
Bottom Overlay:
  text "24V" at -792,1820 h30
  text "5V" at 1334,1782 h30
  text "+" at 897,1754 h30 r180
  text "+" at 986,1627.67 h50
  text "-" at 1152,1625.01 h50
  text "+" at -1188,1611.67 h50
  text "-" at -1030,1607.01 h50
  text "3.3+" at 1370,1560 h30
  text "+" at 933,1404 h30 r180
  text "+" at -664,1349 h30
  text "+" at -1076,1347 h30
  text "+" at -876,1345 h30
  text "232" at 1999.31,1126 h30
  text "T-R-G" at 1668,846.02 h30 r270
  text "3.3-DIO-CLK-GND" at 1967.75,456 h30
  text "Duo1" at 1928,-262 h30
  text "G-V-O" at 1608,-438 h30 r270
  text "+" at 9.5,-797 h30 r180
  text "+" at 9.5,-912 h30 r180
  text "+" at 111,-912 h30 r180
  text "V+" at 1106,-1220 h30
  text "12+" at 460,-1226 h30
  text "G-V-O" at 1610,-1234 h30 r270
  text "24+" at -298,-1266 h30
  text "Duo2" at 1912,-1316 h30
  text "+" at -898,-1631 h30 r180
  text "+" at -1186,-1651 h30 r180
  text "Ce2:G-O-V" at 2,-1654 h30
  text "Ce1:G-O-V" at 444,-1656 h30
  text "Zhu:G-O-G-V" at 1084,-1658 h30
  text "zkk24/2/21" at -952,-1946 h30
Mechanical 1:
  lines w6: -1964.6,1275.83 cw(c0,0) -1269.8,1968.5 1269.8,1968.5 cw(c0,0) 1964.34,1276.22 ; -1964.34,-1276.22 ccw(c0,0) -1269.8,-1968.5 1269.8,-1968.5 ccw(c0,0) 1964.42,-1276.1 ; -1964,-1276 -1964,1275.83 ; 1964,-1275.81 1964,1276